# Altium PCB PCB1_r2.PcbDoc (part 2 of 3)
Units mm, origin at the board's own origin, x right, y up, seen from the top; angles counter-clockwise.
Board outline 305 x 172.5 mm, 4 copper layers (Top Layer, GND, VDD, Bottom Layer), stack 1.585 mm thick; 217 components, 137 nets, 764 pads, 352 vias.
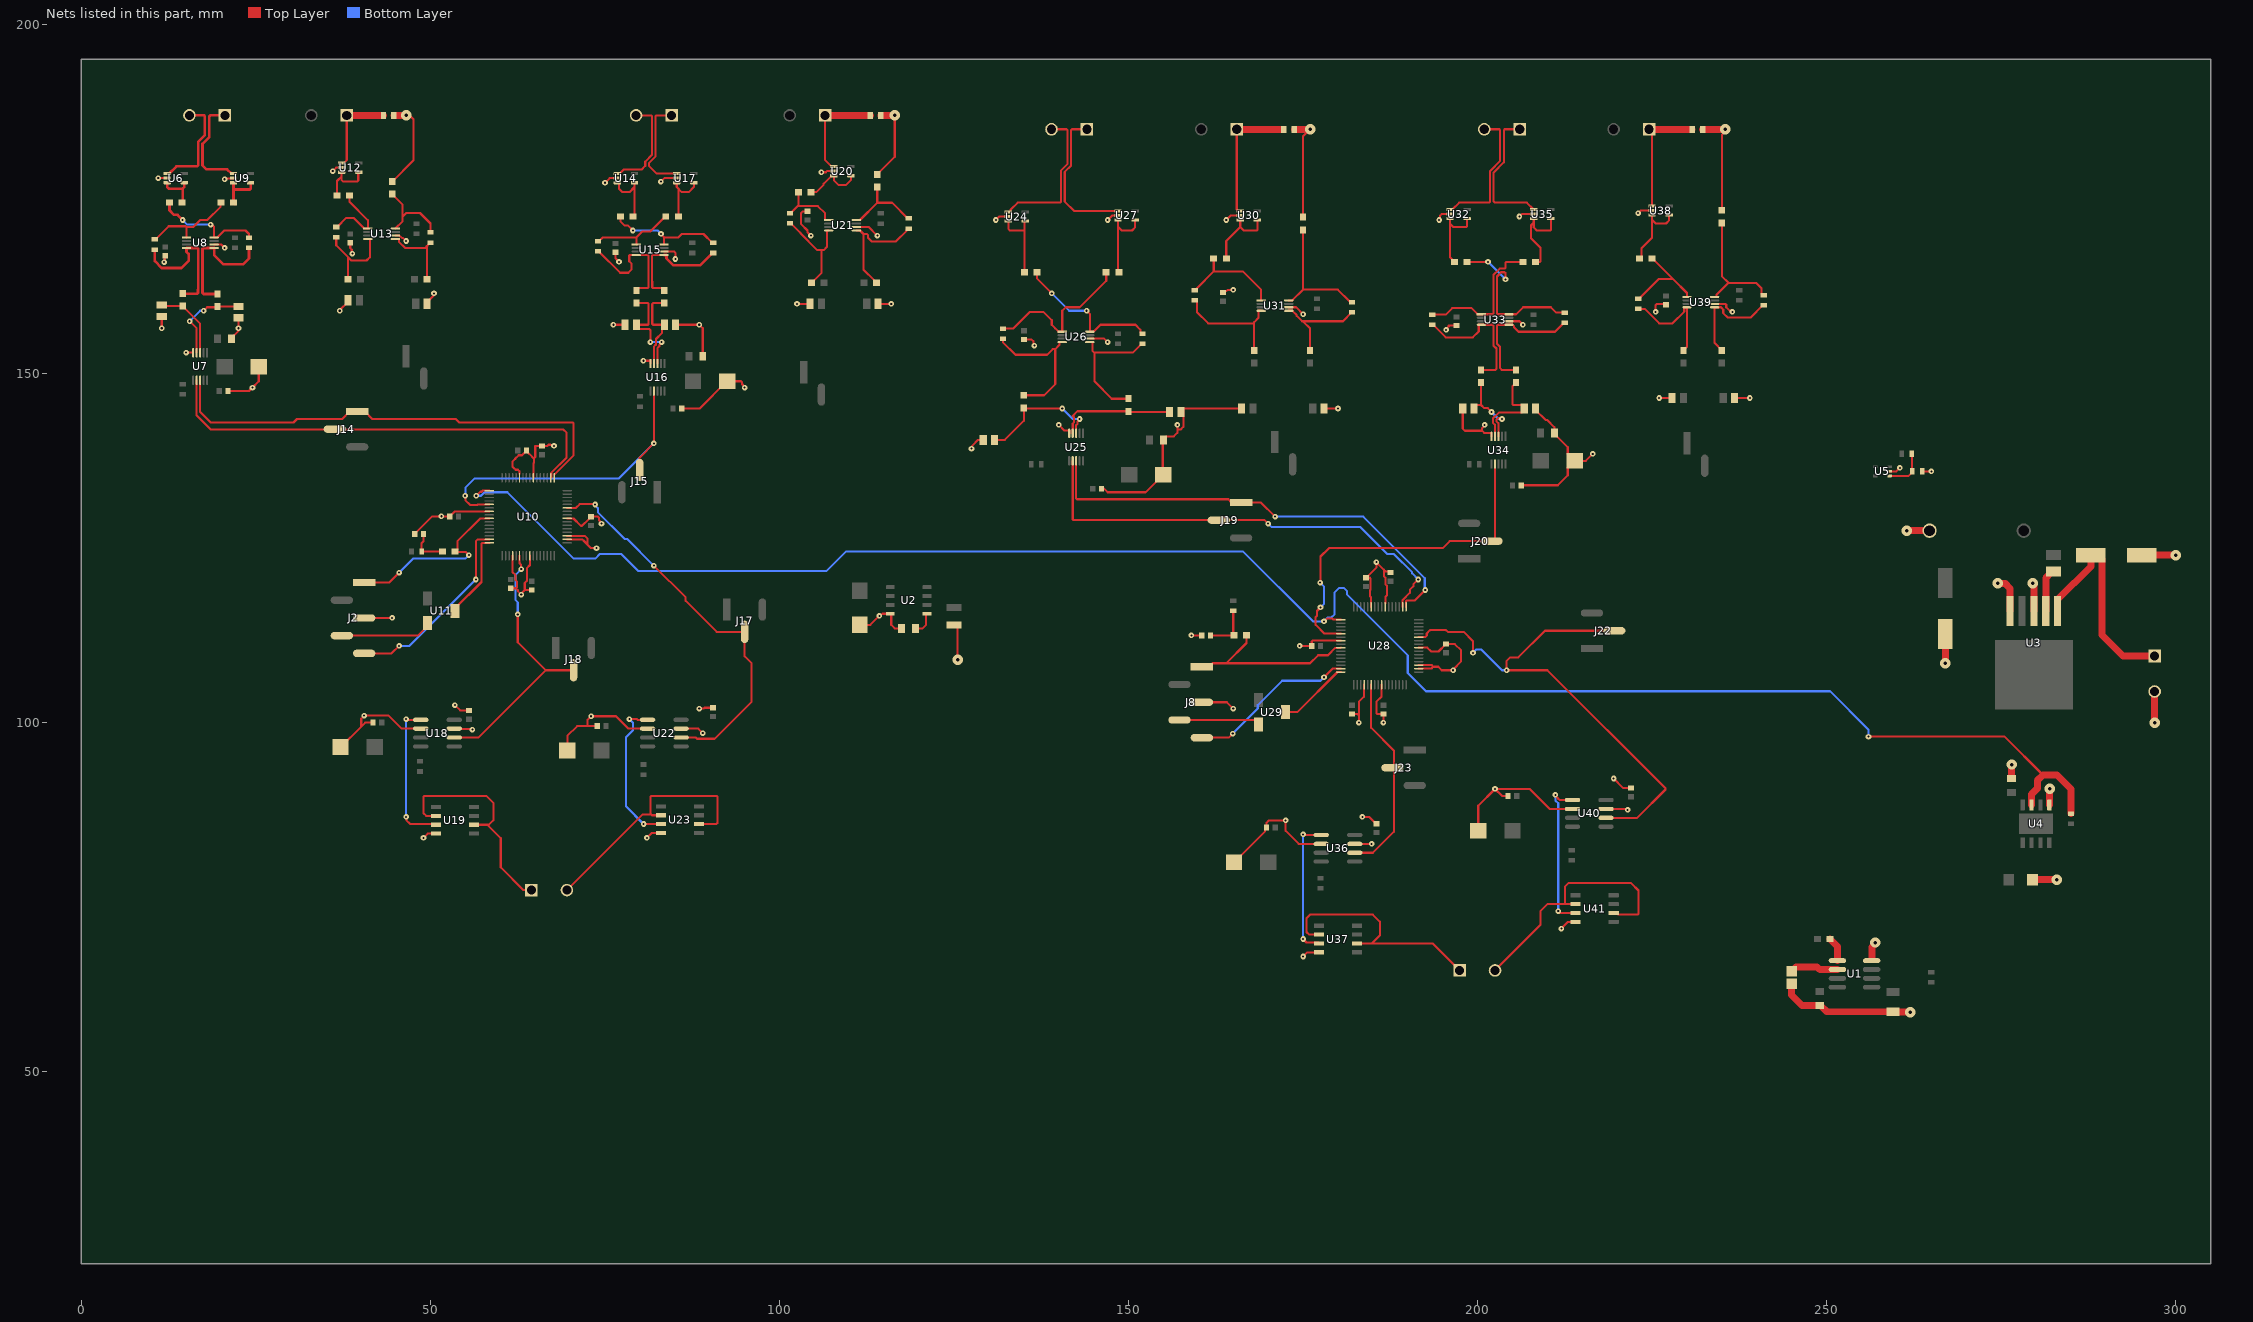
[diagram p4: the nets of this part, all layers, seen from the top]

## Via types
v1: diameter 0.8, hole 0.3, Top Layer to Bottom Layer, 291 vias
v2: diameter 1.5, hole 0.5, Top Layer to Bottom Layer, 48 vias
v3: diameter 0.5, hole 0.3, Top Layer to Bottom Layer, 8 vias
v4: diameter 1.27, hole 0.711, Top Layer to Bottom Layer, 4 vias
v5: diameter 0.83, hole 0.3, Top Layer to Bottom Layer, 1 vias

## Nets (pads, with @x,y where several pads share a name; then routed paths per layer and width w, separated by ;. In a path a pad name is that pad's centre, name@x,y a point inside that pad or via, vN(x,y) a via of type N, cw(c..) or ccw(c..) an arc to the next point about the centre after c; other vN are vias at no path point)
GND: C1.2 C2.2 C3.2 C4.2 C5.1 C6.1 C7.2 C8.2 C9.1 C10.1 C11.1 C12.1 C13.1 C14.1 C15.1 C16.2 C17.2 C18.2 C19.1 C20.2 C21.1 C22.1 C23.2 C24.1 C25.1 C26.2 C27.2 C28.1 C29.2 C30.1 C31.1 C32.1 C33.2 C34.2 C35.2 C36.2 C37.2 C38.2 C39.1 C40.2 C41.1 C42.2 C43.1 C44.1 C45.1 C46.1 C47.1 C48.2 C49.1 C50.1 C51.2 C52.1 C53.1 C54.2 C55.1 C56.1 C57.2 C58.2 C59.1 C60.2 C61.1 C62.1 C63.1 C64.2 C65.2 C66.2 C67.2 C68.2 C69.2 C70.1 C71.2 C72.1 D1.2 J1.2 J2.3 J8.3 R5.2 R15.1 R16.1 R34.1 R35.1 R51.1 R52.1 R70.1 R71.1 U1.4 U2.4 U3.3 U3.5 U4.5 U5.2 U6.2 U7.5 U8.6 U9.2 U10.7 U10.20 U10.25 U10.34 U10.35 U10.40 U10.55 U10.59 U12.2 U13.6 U14.2 U15.6 U16.5 U17.2 U18.2 U18.7 U19.4 U20.2 U21.6 U22.2 U22.7 U23.4 U24.2 U25.5 U26.6 U27.2 U28.7 U28.20 U28.25 U28.34 U28.35 U28.40 U28.55 U28.59 U30.2 U31.6 U32.2 U33.6 U34.5 U35.2 U36.2 U36.7 U37.4 U38.2 U39.6 U40.2 U40.7 U41.4 | length 528.1
  Top Layer w0.3: v1(11,178) U6.2@12.275,178 ; v1(11.5,156.5) C21.1@11.5,158.19 ; v1(11.846,165.973) 11.923,166.05 11.923,166.798 C18.2@12,166.875 ; v1(15,153) U7.5@16,153 ; U8.6@19,168.5 20,168.5 v1(20.5,168) ; v1(20.5,177.846) 20.579,177.925 21.7,177.925 U9.2@21.775,178 ; C19.1@21,147.5 24,147.5 v1(24.5,148) 25.4,148.9 C17.2@25.4,151 ; C20.2@21.5,155 21.5,155.125 22.462,156.087 22.462,156.462 v1(22.5,156.5) C22.1@22.5,158 ; C17.2@25.35,151.5 C17.2@25.4,151.5 ; v1(36,179) 36.5,179.5 U12.2@37.275,179.5 ; v1(37,159) 37.038,159.038 37.038,159.123 38.19,160.275 C25.1@38.19,160.5 ; C33.2@37.1,96.5 37.15,96.5 40.075,99.425 ; C23.2@38.5,168.75 38.5,167.973 38.72,167.753 38.72,167.28 v1(38.816,167.184) ; J2.3@40.5,115 v1(44.5,115) ; C34.2@41.75,100 40.65,100 40.075,99.425 ; R15.1@44.5,177.5 47.562,180.562 47.562,186.438 47.096,186.904 v2@46.649,186.904 ; U13.6@44.971,169.779 45.496,169.779 45.607,169.668 45.675,169.668 45.906,169.437 46.034,169.437 46.471,169 v1(46.5,169) ; C30.1@47.75,127 47.75,127.05 50.2,129.5 v1@51.5,129.5 ; U18.2@48.6,99.135 45.865,99.135 44,101 v1(40.5,101) 40.075,100.575 40.075,99.425 ; v1(49,83.5) 49.595,84.095 U19.4@50.775,84.095 ; C24.1@49.5,160 49.5,160.225 50.462,161.187 50.462,161.462 v1(50.5,161.5) ; v1(51.566,129.566) v1@51.5,129.5 ; U18.7@53.4,99.135 53.457,99.078 55.922,99.078 v1(56,99) ; v1(53.5,102.5) 54.25,101.75 C36.2@55.5,101.75 ; U10.7@58.425,130.25 53.45,130.25 52.75,129.55 C15.1@52.75,129.5 v1@51.5,129.5 ; C13.1@61.5,119.25 62.25,119.25 ; U10.20@61.75,123.925 61.75,121.563 62.196,121.117 62.196,120.405 62.364,120.237 62.364,119.364 62.25,119.25 ; U10.59@62.75,135.603 62.75,135.992 62.517,136.225 62.21,136.225 62.054,136.381 62.041,136.381 61.725,136.696 61.725,137.362 62.146,137.783 62.146,137.833 62.617,138.304 63.104,138.304 63.75,138.95 C12.1@63.75,139 63.975,138.775 63.975,138.662 64.128,138.509 64.804,137.833 64.804,137.828 ; v1(63,118.346) v1@63,118.5 ; U10.25@64.25,123.925 64.25,122.573 63.804,122.127 63.804,120.309 63.5,120.005 63.5,119.114 63.614,119 ; C14.1@64.5,119 63.614,119 ; U10.55@64.75,135.075 64.75,137.113 64.804,137.167 64.804,137.828 ; C11.1@65.95,139.625 65,139.625 65,138.024 64.804,137.828 ; C11.1@66,139.625 66.708,139.625 66.897,139.814 67.186,139.814 67.248,139.752 67.59,139.752 v1(67.686,139.657) ; U10.34@69.575,126.25 71.75,126.25 71.985,126.015 73,125 v1(73.779,125) ; U10.35@69.575,126.75 72.113,126.75 72.5,126.363 72.5,125.5 ; U10.40@69.575,129.25 70.492,129.25 71.54,128.202 71.702,128.202 72.725,129.225 72.725,129.275 72.95,129.5 C10.1@73,129.5 74,129.5 74.129,129.371 74.129,129.006 74.5,128.635 v1(74.5,128.5) ; C37.2@69.6,96 69.6,98.1 71,99.5 72.5,99.5 ; C38.2@73.875,99.5 72.5,99.5 ; v1(75,177.346) 75.654,178 U14.2@76.775,178 ; v1(76.19,157) C31.1@77.88,157 ; C26.2@76.5,167.375 76.5,166.5 v1(77,166) ; v1(80.5,151.846) 80.51,151.835 81.5,151.835 81.5,151.962 U16.5@81.5,151.45 ; v1(81,83.5) 81.69,84.19 U23.4@83,84.19 ; U22.2@81.1,99.135 78.365,99.135 76.581,100.919 v1(73,100.919) 72.5,100.419 72.5,99.5 ; v1(83,177.5) 83.5,178 U17.2@85.275,178 ; U15.6@83.45,167.5 84.886,167.5 85.086,167.3 v1(85.086,166.414) ; C32.1@85.12,157 v1(88.5,157) 89,156.5 C29.2@89,152.375 ; U22.7@85.9,99.135 88.365,99.135 v1(89,98.5) ; C28.1@86,145 88.552,145 92.452,148.9 C27.2@92.502,148.9 94.502,148.9 94.629,148.772 94.629,148.506 95,148.135 v1(95,148) ; v1(88.5,102) 89.143,102 89.268,102.125 C40.2@90.5,102.125 ; v1(102.5,160) C41.1@104.38,160 ; C35.2@104,173.25 103.336,173.25 103.096,173.01 103.096,171.404 104,170.5 104,170.257 v1(104.5,169.757) ; v1(106,178.846) 106.004,178.85 106.639,178.85 106.789,179 U20.2@107.775,179 ; U21.6@111,171 112.786,171 v1(114.023,169.763) ; C7.2@111.5,114 113,114 v1(114.298,115.298) 114.433,115.298 114.73,115.595 U2.4@115.875,115.595 ; R35.1@114,178.5 114,178.55 116.5,181.05 v2(116.5,187) ; C39.1@114.12,160 v1(116,160) ; U2.4@116,115.47 116,114 116.5,113.5 C2.2@117.5,113.5 ; C1.2@125,114 125.15,114 125.5,113.65 v2(125.5,109.004) ; v1(127.5,139.257) 127.596,139.353 127.596,139.655 128.441,140.5 C52.1@129.19,140.5 ; v1(131,172) 131.5,172.5 U24.2@132.775,172.5 ; C48.2@135,154.875 136.125,154.875 136.404,154.596 136.404,154.096 v1(136.5,154) ; v1(140,142.654) 140.829,141.825 141.5,141.825 U25.5@141.5,141.45 ; U26.6@144.45,155 146.5,155 v1(147,154.5) ; 146.5,133.5 147,133 152.45,133 154.95,135.5 C42.2@155,135.5 ; v1(147,172) 147.65,172.65 U27.2@148.5,172.65 ; C42.2@154.9,135.5 154.9,140.4 C51.2@155,140.5 155,140.625 155.35,140.975 155.475,140.975 155.5,141 156.5,141 157,141.5 157,142 ; v1(157,142.654) 157,142 ; v1(159,112.5) C61.1@160.5,112.5 ; J8.3@160.5,102.92 164.08,102.92 v1(165,102) ; C54.2@163.5,161.625 163.725,161.85 164.046,161.85 164.196,162 v1(165,162) ; v1(164,172) 164.65,172.65 U30.2@166,172.65 ; C64.2@165.1,80 165.15,80 169.525,84.375 169.525,84.775 C65.2@169.75,85 169.778,85.028 169.778,85.664 170.114,86 v1(172.5,86) 172.5,84.5 174.365,82.635 U36.2@177.6,82.635 ; C56.1@166.19,145 157.86,145 157.859,142.359 157.5,142 157,142 ; U31.6@172.95,159.5 174,159.5 v1(175,158.5) ; v1(174.5,111) C49.1@176.25,111 176.25,111.636 176.364,111.75 U28.7@180.425,111.75 ; v1(175,66.5) 175.595,67.095 U37.4@177.275,67.095 ; R51.1@175,172.4 175,184 v2(176,185) ; C55.1@178,145 v1(180,145) ; C46.1@182,101.25 182.75,101.25 182.846,101.154 183,101.154 ; U36.7@182.4,82.635 v1(184.811,82.635) ; v1(183,100) 183,101.154 ; v1(183.5,86.5) 184.45,86.5 185.45,85.5 C67.2@185.5,85.5 ; U28.20@183.75,105.425 183.706,105.381 183.706,103.706 183,103 183,101.154 ; C45.1@184,120.75 C45.1@184.05,120.75 ; U28.59@184.75,116.575 184.75,117.966 184.609,118.108 184.609,118.971 184.669,119.031 184.669,120.636 184.555,120.75 C45.1@184.05,120.75 ; U28.25@186.25,105.425 186.25,103.75 185.5,103 185.5,101.364 185.614,101.25 C47.1@186.5,101.25 v1(186.5,100) ; U28.55@186.794,117.103 186.794,117.268 186.819,117.293 186.819,118.045 187,118.226 187,119.612 186.836,119.776 186.836,120.72 186.58,120.976 186.58,121.92 ; C44.1@187.5,121.5 187.336,121.664 186.836,121.664 186.58,121.92 ; U28.34@191.575,107.75 193.408,107.75 193.658,108 ; U28.35@191.575,108.25 193.408,108.25 193.658,108 ; U28.40@191.575,110.75 192.8,110.75 193.354,110.196 194.396,110.196 195.45,111.25 196.75,111.25 197.654,110.346 197.654,108.768 196.5,107.614 v1(196.5,107.5) 194.863,107.5 194.363,108 193.658,108 ; v1(194.5,172) 194.596,172.096 194.596,172.596 194.85,172.85 U32.2@196.05,172.85 ; v1(195.505,156.257) 195.505,156.392 195.875,156.762 195.875,156.875 C57.2@197,156.875 ; C62.1@197.88,145 197.88,142.12 198.187,141.813 200.633,141.813 ; C68.2@200.1,84.5 200.1,88.1 v1(202.5,90.5) ; v1(201,142.654) 201,142.519 200.633,142.151 200.633,141.813 ; U34.5@202,141 202,141.462 201.038,141.462 201,141.5 200.946,141.5 200.633,141.813 ; C69.2@204.375,89.5 203.5,89.5 v1(202.5,90.5) ; U33.6@204.5,157.5 206,157.5 v1(206.5,157) ; v1(206,172.5) 206.35,172.85 U35.2@208.05,172.85 ; C59.1@206.25,134 211.5,134 212.925,135.425 212.925,136.525 C58.2@213.9,137.5 ; C63.1@208.31,145 208.31,144.775 209.722,143.363 209.947,143.363 211,142.31 C60.2@211,141.5 211,141.375 212.925,139.45 212.925,138.475 C58.2@213.9,137.5 ; v1(212,70.5) 212.96,71.46 U41.4@214.05,71.46 ; U40.2@213.6,87.635 210.365,87.635 207.5,90.5 v1(202.5,90.5) ; v1(216.5,138.5) 215.5,137.5 C58.2@213.95,137.5 C58.2@213.9,137.5 ; U40.7@218.4,87.635 221.311,87.635 221.446,87.5 v1(221.5,87.5) ; v1(219.5,92) 220.875,90.625 C71.2@222,90.625 ; v1(223,173) 223.35,173.35 U38.2@225,173.35 ; v1(225.5,158.846) 225.5,159.81 225.652,159.962 226.913,159.962 C66.2@227,159.875 ; v1(226,146.5) C72.1@227.88,146.5 ; U39.6@233.95,160 235.5,160 235.629,159.871 235.629,159.506 236.135,159 236.211,159 236.365,158.846 v1(236.5,158.846) ; R71.1@235,173.4 235,184.175 235.5,184.675 v2(235.5,185) ; C70.1@236.81,146.5 v1(239,146.5) ; U5.2@259.025,136 259.027,136.002 260.002,136.002 v1(260.5,136.5) ; R5.2@263.725,136 v1(265,136) ; 62.25,119.25 62.519,118.981 62.519,118.827 62.837,118.509 62.991,118.509 v1@63,118.5 ; v1@63,118.5 63.019,118.5 63.371,118.852 63.371,118.871 63.5,119 63.614,119 ; C45.1@184.05,120.75 185.5,122.2 v1(185.5,123) 186.58,121.92
  Top Layer w1: R16.1@44.75,187 v2(46.553,187) v2@46.649,186.904 ; R34.1@114.5,187 v2(116.5,187) ; R52.1@173.75,185 v2(176,185) ; R70.1@232.25,185 v2(235.5,185) ; C9.1@245,62.2 245,61 246.5,59.5 C3.2@249,59.5 249.125,59.5 250.045,58.58 C5.1@259.5,58.58 259.54,58.54 261.96,58.54 v2(262,58.5) ; U1.4@256.475,66.055 256.475,67.84 257,68.365 v2(257,68.5) ; v2(261.5,127.5) D1.2@264.755,127.5 ; v2(267,108.5) C16.2@267,112.7 ; v2(274.496,120) 274.592,119.904 275.599,119.904 276.3,119.203 U3.5@276.3,116 ; C4.2@276.5,92 v2(276.5,94) ; C6.1@279.5,77.5 v2(283,77.5) ; v2(279.504,120) 279.504,119.865 279.7,119.669 U3.3@279.7,116 ; U4.5@281.905,88.2 281.952,88.247 281.952,90.452 v2(282,90.5) ; C8.2@295.15,124 v2(300,124) ; v2(297,100) J1.2@297,104.46
MISO1_S1: J14.2 U7.7 U10.50 | length 66.4
  Top Layer w0.3: U7.7@16.5,149.05 16.5,144 18.5,142 36.3,142 69,142 69.5,141.5 69.5,137.978 67.294,135.772 67.294,135.119 U10.50@67.25,135.075
MISO1_S3: J19.2 U25.7 U28.50 | length 66.4
  Top Layer w0.3: U25.7@142,137.5 142,129.114 142.114,129 169.5,129 v1(170,128.5) ; U28.50@189.25,116.575 189.25,117.55 190.304,118.604 190.304,119.017 190.804,119.517 190.804,119.804 v1(191.5,120.5)
  Bottom Layer w0.3: v1(170,128.5) 170.5,128 183.221,128 187.063,124.158 187.979,124.158 190.619,121.518 190.619,121.381 v1(191.5,120.5)
MISO2_S2: J15.2 U10.5 U16.7 | length 47.3
  Top Layer w0.3: v1(54.95,132.5) 55.002,132.448 55.002,131.861 55.667,131.196 56.755,131.196 56.809,131.25 U10.5@58.425,131.25 ; J15.2@79.96,136.2 79.96,137.96 v1(82,140) U16.7@82,147.5
  Bottom Layer w0.3: v1(54.95,132.5) 55,132.55 55,133.637 56.363,135 77,135 v1(82,140)
MISO2_S4: J20.2 U28.5 U34.7 | length 51.4
  Top Layer w0.3: v1(177.444,120.056) 177.5,120.113 177.5,123.793 178.707,125 195,125 196,126 J20.2@202,126 202.154,126 202.5,126.346 U34.7@202.5,137.05 ; v1(177.5,116.5) 177,116 177,115.292 176.807,115.1 176.807,114.006 178.063,112.75 U28.5@180.425,112.75
  Bottom Layer w0.3: v1(177.444,120.056) 178.012,119.488 178.012,117.012 v1(177.5,116.5)
MOSI3_S1: J18.2 U10.22 U18.6 | length 39.8
  Top Layer w0.3: U18.6@53.4,97.865 55.295,97.865 55.314,97.846 56.846,97.846 66.5,107.5 ; v1(62.5,115.5) 62.5,111.5 66.5,107.5 ; U10.22@62.75,123.925 62.75,122.861 62.972,122.639 62.972,122.028 v1(63,122) ; J18.2@70.5,107.5 66.5,107.5
  Bottom Layer w0.3: v1(62.5,115.5) 62.5,117.235 62.196,117.539 62.196,121.196 v1(63,122)
MOSI3_S3: J23.2 U28.22 U36.6 | length 29.4
  Top Layer w0.3: U36.6@182.4,81.365 185.002,81.365 188,84.363 188,93.34 J23.2@187.8,93.54 188,93.74 188,96 184.75,99.25 U28.22@184.75,105.425
MOSI4_S2: J17.2 U10.43 U22.6 | length 56.7
  Top Layer w0.3: U10.43@69.575,130.75 70.825,130.75 71.379,131.304 73.532,131.304 v1(73.587,131.25) ; v1(82,122.5) 86.548,117.952 86.548,117.452 91,113 J17.2@95,113 95,109.5 96,108.5 96,103 90.696,97.696 88.17,97.696 88.001,97.865 U22.6@85.9,97.865
  Bottom Layer w0.3: v1(73.587,131.25) 73.587,131.126 73.976,130.736 73.976,130.161 77.827,126.31 78.19,126.31 v1(82,122.5)
MOSI4_S4: J22.2 U28.43 U40.6 | length 75.7
  Top Layer w0.3: U28.43@191.575,112.25 192.492,112.25 192.725,112.483 192.725,112.79 192.881,112.946 192.881,112.959 193.196,113.275 195.461,113.275 195.735,113 198,113 199.346,111.654 v1(199.346,110) ; U40.6@218.4,86.365 222.865,86.365 226.919,90.419 226.919,90.581 210,107.5 v1(204.154,107.5) 204.127,107.527 204.127,108.771 204.702,109.346 205.846,109.346 209.665,113.165 J22.2@219.584,113.165
  Bottom Layer w0.3: v1(199.346,110) 199.846,110.5 200.5,110.5 203.5,107.5 v1(204.154,107.5)
NetC2_1: C2.1 U2.5 | length 3.4
  Top Layer w0.3: C2.1@119.5,113.5 120.5,113.5 121,114 121,115.47 U2.5@121.125,115.595
NetC8_1: C8.1 J1.1 U3.1 | length 31.5
  Top Layer w1: U3.1@283.1,116 283.1,117.65 285.461,120.011 285.499,120.011 287.85,122.361 C8.1@287.85,124 288.925,124 289.475,123.45 289.475,112.525 292.46,109.54 J1.1@297,109.54
NetC9_2: C9.2 U1.6 | length 7
  Top Layer w1: C9.2@245,64.4 245.025,64.4 245.629,65.004 248.654,65.004 249.023,64.635 U1.6@251.55,64.635
NetC30_2: C30.2 R24.1 R27.1 | length 5.6
  Top Layer w0.3: C30.2@49,127 49,126 48.725,125.725 R24.1@48.725,124.5 R27.1@51.7,124.5
NetC61_2: C61.2 R60.1 R63.1 | length 6.9
  Top Layer w0.3: C61.2@161.75,112.5 R63.1@165.1,112.5 165,112.6 R60.1@165,116
NetJ2_1: J2.1 R27.2 U10.9 | length 26.4
  Top Layer w0.3: J2.1@40.5,120.08 44.08,120.08 v1(45.5,121.5) ; R27.2@53.5,124.5 R27.2@53.55,124.5 ; v1(55.5,124) 55.496,124 55.046,124.45 53.6,124.45 R27.2@53.55,124.5 ; U10.9@58.425,129.25 57.113,129.25 53.85,125.987 53.85,124.8 R27.2@53.55,124.5
  Bottom Layer w0.3: v1(45.5,121.5) 47.5,123.5 55,123.5 v1(55.5,124)
NetJ2_4: J2.4 U11.1 | length 13.2
  Top Layer w0.3: J2.4@37.3,112.46 48.16,112.46 49.6,113.9 U11.1@49.6,114.25
NetJ2_5: J2.5 U10.15 | length 27.9
  Top Layer w0.3: J2.5@40.5,109.92 44.42,109.92 v1(45.5,111) ; v1(56.5,120.5) 56.5,126 56.75,126.25 U10.15@58.425,126.25
  Bottom Layer w0.3: v1(45.5,111) 47,111 v1(56.5,120.5)
NetJ3_1: J3.1 R16.2 U12.1 | length 12.6
  Top Layer w0.3: U12.1@37.275,180.15 37.575,180.15 38,180.575 J3.1@38,187
  Top Layer w1: J3.1@38,187 R16.2@43.25,187
NetJ5_1: J5.1 R34.2 U20.1 | length 14.5
  Top Layer w0.3: J5.1@106.54,187 106.54,180.585 107.475,179.65 U20.1@107.775,179.65
  Top Layer w1: J5.1@106.54,187 R34.2@113,187
NetJ8_1: J8.1 R63.2 U28.9 | length 26.3
  Top Layer w0.3: J8.1@160.5,108 161.575,108 161.95,108.375 161.95,108.386 162.064,108.5 164,108.5 ; R63.2@166.9,112.5 166.9,111.4 164,108.5 ; U28.9@180.425,110.75 180.381,110.706 179.631,110.706 178.579,109.654 177.154,109.654 176,108.5 164,108.5
NetJ8_4: J8.4 U29.1 | length 11.6
  Top Layer w0.3: J8.4@157.3,100.38 168.1,100.38 168.6,99.88 U29.1@168.6,99.75
NetJ8_5: J8.5 U28.15 | length 24.3
  Top Layer w0.3: J8.5@160.5,97.84 164.34,97.84 v1(164.934,98.434) ; v1(178,106.5) 179.25,107.75 U28.15@180.425,107.75
  Bottom Layer w0.3: v1(164.934,98.434) 168.515,102.015 168.515,102.515 172,106 177.5,106 v1(178,106.5)
NetJ9_1: J9.1 R52.2 U30.1 | length 19
  Top Layer w0.3: J9.1@165.5,185 165.5,173.5 165.7,173.3 U30.1@166,173.3 ; R52.2@171.875,185 R52.2@172.25,184.625
  Top Layer w1: J9.1@165.5,185 R52.2@171.875,185
NetJ11_1: J11.1 R70.2 U38.1 | length 17.3
  Top Layer w0.3: J11.1@224.58,185 225,184.58 U38.1@225,174
  Top Layer w1: J11.1@224.58,185 R70.2@230.75,185
NetL1_1: L1.1 U3.2 | length 6.1
  Top Layer w1: U3.2@281.4,116 281.4,120.726 282.174,121.5 L1.1@282.5,121.5
NetR3_1: R3.1 U1.5 | length 3.5
  Top Layer w1: R3.1@250.5,69 251.55,67.95 U1.5@251.55,65.905
NetR4_1: R4.1 R5.1 U5.1 | length 6.1
  Top Layer w0.3: U5.1@259.025,135.35 261.75,135.35 262.275,135.875 262.25,135.9 262.25,138.475 R4.1@262.225,138.5
NetR15_2: R15.2 R18.2 U13.8 | length 12.1
  Top Layer w0.3: R15.2@44.5,175.7 46,174.2 46,172.5 ; U13.8@44.971,170.779 46,171.808 46,172.5 ; R18.2@50,170.225 50,171.5 48.5,173 46.5,173 46,172.5
NetR17_1: R17.1 U12.3 U12.4 | length 7.9
  Top Layer w0.3: R17.1@36.6,175.5 36.6,177.6 37.275,178.275 ; U12.3@37.275,178.85 37.275,178.275 ; U12.4@39.725,178.85 39.65,178.775 39.65,177.65 39.536,177.536 37.464,177.536 37.275,177.725 37.275,178.275
NetR17_2: R17.2 R19.2 U13.1 | length 11.5
  Top Layer w0.3: R19.2@36.5,171 36.625,171 37.929,172.304 38.97,172.304 40.496,170.779 U13.1@41.021,170.779 41.021,171.979 38.4,174.6 R17.2@38.4,175.5
NetR18_1: R18.1 R20.1 U13.5 | length 10.9
  Top Layer w0.3: U13.5@44.971,169.279 45.473,169.279 45.473,168.89 46.363,168 49.225,168 49.5,168.275 ; R20.1@49.5,163.5 49.5,168.275 ; R18.1@50,168.775 49.7,168.475 49.5,168.275
NetR19_1: R19.1 R21.1 U13.4 | length 13.1
  Top Layer w0.3: R19.1@36.5,169.55 36.5,168.363 38.2,166.663 ; R21.1@38.2,163.5 38.2,166.663 ; U13.4@41.021,169.279 41.304,169.279 41.304,166.667 40.833,166.196 38.667,166.196 38.2,166.663
NetR35_2: R35.2 R36.2 U21.8 | length 11.7
  Top Layer w0.3: U21.8@111,172 111.525,172 113.997,174.472 ; R35.2@113.997,176.697 113.997,174.472 ; R36.2@118.5,172.225 118.375,172.225 116.128,174.472 113.997,174.472
NetR36_1: R36.1 R39.1 U21.5 | length 17
  Top Layer w0.3: U21.5@111,170.5 111.525,170.5 112.025,170 ; R39.1@113.9,163 113.85,163 113.55,163.3 113.55,163.35 112.025,164.875 112.025,170 ; R36.1@118.5,170.775 118.375,170.775 118.2,170.6 118.2,170.475 116.678,168.953 113.167,168.953 112.696,169.424 112.696,169.804 112.5,170 112.025,170
NetR37_1: R37.1 U20.3 U20.4 | length 8.6
  Top Layer w0.3: R37.1@104.5,176 105.239,176 106.319,177.081 106.319,177.194 107.475,178.35 U20.3@107.775,178.35 107.775,177.725 108.5,177 109.5,177 110.225,177.725 U20.4@110.225,178.35
NetR37_2: R37.2 R40.2 U21.1 | length 9.7
  Top Layer w0.3: R40.2@101.2,173.175 101.375,173 R40.2@101.5,173 101.625,173 102.7,174.075 ; R37.2@102.7,176 102.7,174.075 ; U21.1@107.05,172 106.525,172 106.525,172.975 105.5,174 102.775,174 102.7,174.075
NetR40_1: R40.1 R41.1 U21.4 | length 15
  Top Layer w0.3: R40.1@101.5,171.55 101.625,171.55 102.983,170.192 102.983,170.137 105.424,167.696 106.025,167.696 ; R41.1@104.6,163 104.65,163 104.95,163.3 104.95,163.35 106.025,164.425 106.025,167.696 ; U21.4@107,170.5 106.804,170.5 106.804,168.167 106.333,167.696 106.025,167.696
NetR51_2: R51.2 R54.2 U31.8 | length 19
  Top Layer w0.3: U31.8@172.95,160.5 173.475,160.5 175,162.025 ; R51.2@175,170.6 175,162.025 ; R54.2@182,160.225 181.825,160.4 181.6,160.4 179.975,162.025 175,162.025
NetR53_1: R53.1 U30.3 U30.4 | length 10.5
  Top Layer w0.3: R53.1@164,166.5 164,169 166,171 ; U30.3@166,172 166,171 ; U30.4@168.45,172 168.5,171.95 168.5,170.614 168.386,170.5 166.5,170.5 166,171
NetR53_2: R53.2 R55.2 U31.1 | length 15.1
  Top Layer w0.3: R55.2@159.5,161.95 159.625,161.95 159.8,162.125 159.8,162.25 162.2,164.65 ; R53.2@162.2,166.5 162.2,164.65 ; U31.1@169,160.5 169,162 166.35,164.65 162.2,164.65
NetR54_1: R54.1 R56.1 U31.5 | length 14.9
  Top Layer w0.3: U31.5@172.95,159 173.475,159 174.071,158.404 174.071,158.292 174.863,157.5 174.975,157.5 ; R56.1@176,153.3 176,156.475 174.975,157.5 ; R54.1@182,158.775 180.725,157.5 174.975,157.5
NetR55_1: R55.1 R57.1 U31.4 | length 17.2
  Top Layer w0.3: R55.1@159.5,160.5 159.625,160.5 159.8,160.325 159.8,158.814 161.418,157.196 167.833,157.196 168,157.363 ; R57.1@168,153.3 168,157.363 ; U31.4@169,159 168.625,159 168.625,157.988 168,157.363
NetR71_2: R71.2 R72.2 U39.8 | length 18.2
  Top Layer w0.3: U39.8@233.95,161 234.225,161 234.225,161.275 235.95,163 ; R71.2@235,171.6 235,163.95 235.95,163 ; R72.2@241,161.225 240.875,161.225 240.7,161.4 240.7,162.186 239.886,163 235.95,163
NetR72_1: R72.1 R75.1 U39.5 | length 15.3
  Top Layer w0.3: R75.1@235,153.3 235,153.35 233.95,154.4 U39.5@233.95,159.5 234.864,159.5 235.196,159.168 235.196,158.667 235.821,158.042 239.142,158.042 240.875,159.775 R72.1@241,159.775
NetR73_1: R73.1 U38.3 U38.4 | length 10.5
  Top Layer w0.3: R73.1@223.2,166.5 223.5,166.8 223.5,168 225,169.5 225,172 ; U38.3@225,172.7 225,172 ; U38.4@227.45,172.7 227.45,171.95 227,171.5 225.5,171.5 225,172
NetR73_2: R73.2 R76.2 U39.1 | length 13.8
  Top Layer w0.3: R76.2@223,160.725 223.125,160.725 225.925,163.525 228.025,163.525 ; R73.2@225,166.5 225.05,166.5 228.025,163.525 ; U39.1@230,161 230,161.55 228.025,163.525
NetR76_1: R76.1 R77.1 U39.4 | length 15.6
  Top Layer w0.3: R76.1@223,159.275 223.934,159.275 226.017,157.192 227.934,157.192 229.611,158.869 229.611,159.5 U39.4@230,159.5 230,153.85 229.5,153.35 R77.1@229.5,153.3
NetU10_16: U10.16 U11.3 | length 12.4
  Top Layer w0.3: U11.3@53.5,116 53.5,116.35 57.304,120.154 57.304,125.636 57.418,125.75 U10.16@58.425,125.75
NetU18_1: U18.1 U19.3 | length 20.9
  Top Layer w0.3: v1(46.5,86.5) 46.538,86.462 46.538,86.016 47.054,85.5 U19.3@50.635,85.5 ; v1(46.5,100.5) 46.554,100.5 46.649,100.405 U18.1@48.6,100.405
  Bottom Layer w0.3: v1(46.5,86.5) v1(46.5,100.5)
NetU22_1: U22.1 U23.3 | length 21.8
  Top Layer w0.3: v1(78.5,100.5) 78.504,100.504 79.54,100.504 79.639,100.405 U22.1@81.1,100.405 ; v1(80.52,85.48) 82.98,85.48 U23.3@83,85.46
  Bottom Layer w0.3: v1(78.5,100.5) 79,100 79,98.914 78.018,97.932 78.018,87.982 v1(80.52,85.48)
NetU28_16: U28.16 U29.3 | length 10.3
  Top Layer w0.3: U29.3@172.5,101.5 174.191,101.5 179.941,107.25 U28.16@180.425,107.25
NetU36_1: U36.1 U37.3 | length 20.2
  Top Layer w0.3: v1(175,69) 175.5,68.5 177.14,68.5 U37.3@177.275,68.365 ; v1(175,84) 175.054,84 175.149,83.905 U36.1@177.6,83.905
  Bottom Layer w0.3: v1(175,69) v1(175,84)
NetU40_1: U40.1 U41.3 | length 22.3
  Top Layer w0.3: v1(211.154,89.65) 211.154,89.515 211.525,89.144 211.525,89.129 211.749,88.905 U40.1@213.6,88.905 ; v1(211.554,73) 211.824,72.73 U41.3@214.05,72.73
  Bottom Layer w0.3: v1(211.154,89.65) 211.154,88.846 211.554,88.446 v1(211.554,73)
Out_S1: J7.1 U19.2 U19.6 | length 33
  Top Layer w0.3: U19.2@50.775,86.635 49.365,86.635 49,87 49,89.386 49.114,89.5 58,89.5 59,88.5 59,86 58.365,85.365 58.135,85.365 ; U19.6@56.225,85.365 56.65,85.365 58.135,85.365 ; J7.1@64.46,76 63.324,76 60.062,79.262 60.062,83.438 58.135,85.365
Out_S2: J7.2 U23.2 U23.6 | length 36.8
  Top Layer w0.3: J7.2@69.54,76 80.405,86.865 81.635,86.865 ; U23.2@83,86.73 81.77,86.73 81.635,86.865 ; U23.6@88.45,85.46 90.96,85.46 91.114,85.614 91.114,89.386 91,89.5 81.614,89.5 81.5,89.386 81.5,87 81.635,86.865
Out_S3: J13.1 U37.2 U37.6 | length 34.9
  Top Layer w0.3: U37.2@177.275,69.635 175.865,69.635 175.5,70 175.5,72 176,72.5 185,72.5 186,71.5 186,69.5 185,68.5 184.865,68.365 ; U37.6@182.725,68.365 184.865,68.365 ; J13.1@197.42,64.5 193.555,68.365 184.865,68.365
Out_S4: J13.2 U41.2 U41.6 | length 37.4
  Top Layer w0.3: J13.2@202.5,64.5 209,71 209,73 210,74 212.5,74 ; U41.2@214.05,74 212.5,74 ; U41.6@219.5,72.73 219.925,72.73 220.155,72.5 222.938,72.5 223.052,72.614 223.052,75.948 222,77 213,77 212.5,76.5 212.5,74
Pwrctrl_3.3V: R1.1 U4.7 U10.1 U28.1 | length 270.7
  Top Layer w0.3: v1(56.558,132.5) 57.133,133.075 57.333,133.075 57.508,133.25 U10.1@58.425,133.25 ; v1(178,114.5) 178.019,114.5 178.461,114.942 179.166,114.942 179.358,114.75 U28.1@180.425,114.75 ; v1(256,98) 275.5,98 281,92.5
  Top Layer w1: U4.7@279.365,88.2 279.365,89.738 280.183,90.556 280.183,91.683 281,92.5 283,92.5 285,90.5 R1.1@285,86.95
  Bottom Layer w0.3: v1(56.558,132.5) 57.242,132.5 57.742,133 61,133 70.5,123.5 73.596,123.5 74.25,124.154 77.346,124.154 79.804,121.696 106.696,121.696 109.5,124.5 166.425,124.5 176.425,114.5 v1(178,114.5) 178.557,115.057 179.057,115.057 179.519,115.519 179.519,118.656 180.167,119.304 180.833,119.304 181.304,118.833 181.304,118.333 190,109.637 190,107.114 192.614,104.5 250.5,104.5 256,99 v1(256,98)
S1_AIN_N: C22.2 R13.2 U7.4 | length 12.8
  Top Layer w0.3: v1@15.554,157.5 v1(15.5,157.5) 16.5,156.5 U7.4@16.5,153 ; v1(17.5,159) 18,159.5 19.4,159.5 R13.2@19.5,159.6 22.48,159.6 C22.2@22.5,159.62
  Bottom Layer w0.3: v1(15.5,157.5) 17,159 v1(17.5,159)
S1_AIN_P: C21.2 R10.2 U7.3 | length 10.8
  Top Layer w0.3: C21.2@11.5,159.81 11.61,159.7 R10.2@14.5,159.7 14.5,159.65 17,157.15 U7.3@17,153
S1_BUFFO_N: R8.1 U9.3 U9.4 | length 6.6
  Top Layer w0.381: U9.3@21.775,177.35 21.775,176.5 ; R8.1@22,174.3 21.775,174.525 21.775,176.363 21.775,176.5 ; U9.4@24.225,177.35 24.225,176.5 24.087,176.363 21.913,176.363 21.775,176.5
S1_BUFFO_P: R7.1 U6.3 U6.4 | length 5.9
  Top Layer w0.381: U6.3@12.275,177.35 12.275,176.725 12.5,176.5 14.5,176.5 ; R7.1@14.5,174.5 14.5,176.5 ; U6.4@14.725,177.35 14.725,176.725 14.5,176.5
S1_DRIVERIN_N: R8.2 R11.2 U8.1 | length 13.6
  Top Layer w0.3: R11.2@10.5,169.225 10.625,169.225 12.508,171.108 14.892,171.108 15,171 ; U8.1@15.05,169.5 15.05,170.95 15,171 ; R8.2@20,174.5 19.925,174.425 19.925,173.925 18,172 17,172 16,171 15,171
S1_DRIVERIN_P: R7.2 R9.2 U8.8 | length 16.2
  Top Layer w0.3: v1(18.5,171.346) 18.538,171.308 18.692,171.308 19,171 U8.8@19,169.5 19.444,169.5 20.444,170.5 23.5,170.5 24,170 R9.2@24,169.45
  Top Layer w0.381: R7.2@12.6,174.5 12.6,173.4 13.26,172.74 13.76,172.74 v1(14.5,172)
  Bottom Layer w0.3: v1(14.5,172) 15.154,171.346 v1(18.5,171.346)
S1_DRIVERO_N: R9.1 R13.1 U8.5 | length 18.7
  Top Layer w0.381: R13.1@19.5,161.4 17.505,161.4 17.317,161.588 17.317,161.782 17.343,161.807 17.343,167.862 17.48,168 U8.5@19,168 19,167 20.345,165.655 23.155,165.655 24,166.5 R9.1@24,168
S1_DRIVERO_P: R10.1 R11.1 U8.4 | length 19.6
  Top Layer w0.381: R11.1@10.5,167.775 10.5,166.125 11.496,165.128 14.323,165.128 15.345,166.15 15.345,167.138 15.05,167.432 U8.4@15.05,168 16.57,168 16.708,167.862 16.708,162.07 16.682,162.045 16.682,161.588 16.545,161.45 14.55,161.45 R10.1@14.5,161.5
S1_N: J4.1 U9.1 | length 14.6
  Top Layer w0.381: J4.1@20.54,187 18.455,187 18.317,186.862 18.317,183.889 17.343,182.914 17.343,179.832 17.916,179.258 20.867,179.258 21.475,178.65 U9.1@21.775,178.65
S1_P: J4.2 U6.1 | length 14.6
  Top Layer w0.381: U6.1@12.275,178.65 12.575,178.65 13.62,179.694 16.57,179.694 16.708,179.832 16.708,183.177 17.682,184.152 17.682,186.862 17.545,187 J4.2@15.46,187
S2_AIN_N: C32.2 R31.2 U16.4 | length 12.6
  Top Layer w0.3: U16.4@82,151.45 82,153.863 82.304,154.167 82.304,154.961 83.14,155.797 83.14,156.64 C32.2@83.5,157 81.874,157 81.76,157.114 81.76,159.986 81.874,160.1 R31.2@83.5,160.1
S2_AIN_P: C31.2 R28.2 U16.3 | length 15.5
  Top Layer w0.3: R28.2@79.5,160.1 81.126,160.1 81.24,159.986 81.24,157.114 81.126,157 C31.2@79.5,157 79.5,156.775 79.86,156.415 81.294,156.415 81.5,156.209 v1(81.5,154.5) ; U16.3@82.5,151.45 82.5,153.656 82.804,153.96 82.804,154.136 83.108,154.44 v1(83.108,154.5)
  Bottom Layer w0.3: v1(81.5,154.5) v1(83.108,154.5)
S2_BUFFO_N: R26.1 U17.3 U17.4 | length 8.7
  Top Layer w0.3: U17.3@84.9,177.275 84.975,177.35 U17.3@85.275,177.35 85.275,176.725 86,176 87,176 87.725,176.725 U17.4@87.725,177.35 ; R26.1@85.5,172.5 85.5,176.5
S2_BUFFO_P: R23.1 U14.3 U14.4 | length 8.7
  Top Layer w0.3: U14.3@76.775,177.35 76.925,177.35 77,177.275 77,176.5 77.5,176 78.5,176 79.225,176.725 ; R23.1@79,172.5 79.225,172.725 79.225,176.725 ; U14.4@79.225,177.35 79.225,176.725
S2_DRIVERIN_N: R26.2 R29.2 U15.1 | length 12.2
  Top Layer w0.3: R29.2@74,168.95 74.125,168.95 74.675,169.5 79.5,169.5 ; U15.1@79.5,168.5 79.5,169.5 ; R26.2@83.7,172.5 83.65,172.5 81.5,170.35 80.35,170.35 80,170 79.5,169.5
S2_DRIVERIN_P: R23.2 R25.2 U15.8 | length 16.7
  Top Layer w0.3: R23.2@77.2,172.5 77.2,171.8 77.802,171.198 78.302,171.198 v1(79,170.5) ; v1(83.016,170.019) 83.016,169.984 83.5,169.5 85.5,169.5 86,170 89.1,170 90.375,168.725 R25.2@90.5,168.725 ; U15.8@83.45,168.5 83.45,169.538
  Bottom Layer w0.3: v1(79,170.5) 82.372,170.5 82.377,170.495 82.54,170.495 v1(83.016,170.019)
S2_DRIVERO_N: R25.1 R31.1 U15.5 | length 16.9
  Top Layer w0.3: U15.5@83.45,167 81.849,167 81.735,166.886 81.735,163.202 81.76,163.177 81.76,162.364 81.874,162.25 83.2,162.25 83.5,161.95 R31.1@83.5,161.9 ; R25.1@90.375,167.275 R25.1@90.5,167.275
  Top Layer w0.381: U15.5@83.45,167 83.776,167 83.816,166.96 83.816,166.49 84.806,165.5 88.6,165.5 R25.1@90.375,167.275
S2_DRIVERO_P: R28.1 R29.1 U15.4 | length 17.7
  Top Layer w0.3: R29.1@74,167.5 74.125,167.5 77.172,164.453 78.333,164.453 78.804,164.924 78.804,165.739 78.472,166.071 78.472,166.886 78.586,167 81.101,167 81.215,166.886 81.215,162.986 81.24,162.961 81.24,162.364 81.126,162.25 79.8,162.25 79.5,161.95 R28.1@79.5,161.9
S2_N: J6.1 U17.1 | length 14.3
  Top Layer w0.3: J6.1@84.54,187 82.374,187 82.26,186.886 82.26,181.12 81.285,180.145 81.285,179.768 82.399,178.654 85.271,178.654 U17.1@85.275,178.65
S2_P: J6.2 U14.1 | length 14.3
  Top Layer w0.3: U14.1@76.775,178.65 77.075,178.65 77.671,179.246 80.244,179.246 80.765,179.768 80.765,180.36 81.74,181.335 81.74,186.886 81.626,187 J6.2@79.46,187
S3_AIN_N: C53.2 R49.2 U25.4 | length 16.8
  Top Layer w0.3: U25.4@142,141.45 142,142.825 142.196,143.021 142.196,143.714 141.992,143.917 142.675,144.6 R49.2@150,144.6 150.1,144.5 C53.2@155.88,144.5
S3_AIN_P: C52.2 R46.2 U25.3 | length 18.1
  Top Layer w0.3: C52.2@130.81,140.5 132.275,140.5 135,143.225 R46.2@135,145.1 135.1,145 v1(140.5,145) ; U25.3@142.5,141.45 142.5,142.618 142.696,142.814 142.696,143.136 143,143.44 v1(143,143.5)
  Bottom Layer w0.3: v1(140.5,145) 142,143.5 v1(143,143.5)
S3_BUFFO_N: R44.1 U27.3 U27.4 | length 11.4
  Top Layer w0.3: U27.3@148.5,172 148.5,171 ; R44.1@148.6,164.5 148.5,164.6 148.5,171 ; U27.4@150.95,172 150.95,170.95 150.5,170.5 149,170.5 148.5,171
S3_BUFFO_P: R43.1 U24.3 U24.4 | length 11
  Top Layer w0.3: U24.3@132.775,171.85 132.775,170.725 133,170.5 134.961,170.5 ; R43.1@135.1,164.5 135.1,170.361 134.961,170.5 ; U24.4@135.225,171.85 135.15,171.85 135.075,171.775 135.075,170.614 134.961,170.5
S3_DRIVERIN_N: R44.2 R47.2 U26.1 | length 23.3
  Top Layer w0.3: R47.2@132,156.45 133.45,156.45 135.804,158.804 137.833,158.804 139,157.637 139,157 139.488,156.513 139.488,156.487 139.975,156 U26.1@140.5,156 140.5,159 141,159.5 143,159.5 146.8,163.3 R44.2@146.8,164.5
S3_DRIVERIN_P: R43.2 R45.2 U26.8 | length 21.8
  Top Layer w0.3: R43.2@136.9,164.5 136.9,163.6 v1(139,161.5) ; v1(144,159) 144.5,158.5 144.5,156 144.975,156 145.975,157 151,157 151.7,156.3 151.7,155.9 151.875,155.725 R45.2@152,155.725
  Bottom Layer w0.3: v1(139,161.5) 141.5,159 v1(144,159)
S3_DRIVERO_N: R45.1 R49.1 U26.5 | length 19.4
  Top Layer w0.3: U26.5@144.45,154.5 144.825,154.5 144.825,153.289 145.114,153 ; R49.1@150,146.4 147.6,146.4 145.114,148.886 145.114,153 ; R45.1@152,154.275 151.875,154.275 150.6,153 145.114,153
S3_DRIVERO_P: R46.1 R47.1 U26.4 | length 20.9
  Top Layer w0.3: R47.1@132,155 132,154.5 133.804,152.696 138.333,152.696 139.137,153.5 139.5,153.5 ; R46.1@135,146.9 137.9,146.9 139.5,148.5 139.5,153.5 ; U26.4@140.5,154.5 140.111,154.5 140.111,154.111 139.5,153.5
S3_N: J10.1 U27.1 | length 21.1
  Top Layer w0.3: J10.1@144.04,185 141.874,185 141.76,184.886 141.76,179.798 140.866,178.905 140.866,174.634 142.2,173.3 U27.1@148.5,173.3
S3_P: J10.2 U24.1 | length 21
  Top Layer w0.3: U24.1@133.035,173.15 133.11,173.225 133.11,173.5 133.224,173.614 133.239,173.614 134.125,174.5 140.233,174.5 140.346,174.614 140.346,179.12 141.24,180.014 141.24,184.886 141.126,185 J10.2@138.96,185
S4_AIN_N: C63.2 R67.2 U34.4 | length 13.3
  Top Layer w0.3: U34.4@202.5,141 202.5,142.656 202.196,142.96 202.196,143.559 203.052,144.415 206.33,144.415 206.69,144.775 206.69,145.14 206.33,145.5 205.114,145.5 205,145.614 205,148.2 205.15,148.35 205.2,148.35 205.5,148.65 R67.2@205.5,148.7
S4_AIN_P: C62.2 R64.2 U34.3 | length 11.8
  Top Layer w0.3: C62.2@199.5,145 199.5,145.14 199.86,145.5 200.5,145.5 ; R64.2@200.5,148.7 200.5,145.5 ; v1(202,144.5) 201.452,145.048 200.952,145.048 200.5,145.5 ; U34.3@203,141 203,142.863 202.696,143.167 202.696,143.352 202.975,143.631 203.136,143.631 203.171,143.596 203.404,143.596 v1(203.5,143.5)
  Bottom Layer w0.3: v1(202,144.5) 203,143.5 v1(203.5,143.5)
S4_BUFFO_N: R62.1 U35.3 U35.4 | length 12.6
  Top Layer w0.3: U35.3@208.05,172.2 208.05,171.651 ; R62.1@208.3,166 208.925,166 209.039,166.114 209.039,167.999 207.661,169.377 207.661,171.263 208.05,171.651 ; U35.4@210.5,172.2 210.5,170.614 210.386,170.5 208.5,170.5 208.05,170.95 208.05,171.651
S4_BUFFO_P: R59.1 U32.3 U32.4 | length 10.3
  Top Layer w0.3: U32.3@196.05,172.2 196.05,171.45 ; R59.1@196.7,166 196.65,166 196.35,166.3 196.35,166.35 196.05,166.65 196.05,171.45 ; U32.4@198.5,172.2 198.5,171.114 198.386,171 196.5,171 196.05,171.45
S4_DRIVERIN_N: R62.2 R65.2 U33.1 | length 20.5
  Top Layer w0.3: R65.2@193.5,158.45 195.433,158.45 196.353,159.369 199.156,159.369 200.025,158.5 U33.1@200.55,158.5 202.151,158.5 202.265,158.614 202.265,164.133 203.17,165.037 203.886,165.037 204.009,165.161 204.009,165.877 204.132,166 R62.2@206.5,166
S4_DRIVERIN_P: R59.2 R61.2 U33.8 | length 24.8
  Top Layer w0.3: R59.2@198.5,166 v1(201.5,166) ; v1(204,163.5) 204,164.403 203.886,164.517 203.385,164.517 202.785,163.917 202.785,158.614 202.899,158.5 U33.8@204.5,158.5 205.521,158.5 206.521,159.5 210.5,159.5 211.275,158.725 R61.2@212.5,158.725
  Bottom Layer w0.3: v1(201.5,166) v1(204,163.5)
S4_DRIVERO_N: R61.1 R67.1 U33.5 | length 19.5
  Top Layer w0.3: R67.1@205.5,150.5 203.5,150.5 203.225,150.775 203.225,153.811 202.785,154.25 202.785,156.886 202.899,157 205.025,157 205.196,156.829 205.196,156.667 205.863,156 211.1,156 212.375,157.275 R61.1@212.5,157.275
S4_DRIVERO_P: R64.1 R65.1 U33.4 | length 19.5
  Top Layer w0.3: R65.1@193.5,157 193.625,157 195.429,155.196 199.333,155.196 200.175,156.038 200.175,157 202.151,157 202.265,156.886 202.265,154.035 202.705,153.595 202.705,150.705 202.5,150.5 R64.1@200.5,150.5
S4_N: J12.1 U35.1 | length 19.4
  Top Layer w0.3: J12.1@206.04,185 203.874,185 203.76,184.886 203.76,180.252 202.31,178.802 202.31,174.69 202.5,174.5 207.05,174.5 U35.1@208.05,173.5
S4_P: J12.2 U32.1 | length 19.4
  Top Layer w0.3: U32.1@196.05,173.5 196.35,173.5 197.35,174.5 201.676,174.5 201.79,174.614 201.79,179.017 203.24,180.467 203.24,184.886 203.126,185 J12.2@200.96,185
SCLK1_S1: J14.1 U7.8 U10.49 | length 68.4
  Top Layer w0.3: U7.8@17,149.05 17,144.5 18.5,143 30.375,143 30.875,143.5 37.345,143.5 38.425,144.58 J14.1@39.5,144.58 40.575,144.58 41.655,143.5 53.625,143.5 54.125,143 66,143 70.386,143 70.5,142.886 70.5,138.309 U10.49@67.794,135.603
SCLK1_S3: J19.1 U25.8 U28.49 | length 66
  Top Layer w0.3: U25.8@142.5,137.5 142.5,132.114 142.614,132 164.277,132 164.737,131.54 168.96,131.54 v1(171,129.5) ; U28.49@189.75,116.575 189.75,117.386 189.864,117.5 191,117.5 v1(192.5,119)
  Bottom Layer w0.3: v1(171,129.5) 183.637,129.5 192.434,120.703 192.434,119.066 v1(192.5,119)